# EAGLE board CRBN-60-soldered (EAGLE 9.6.2), part 1 of 2
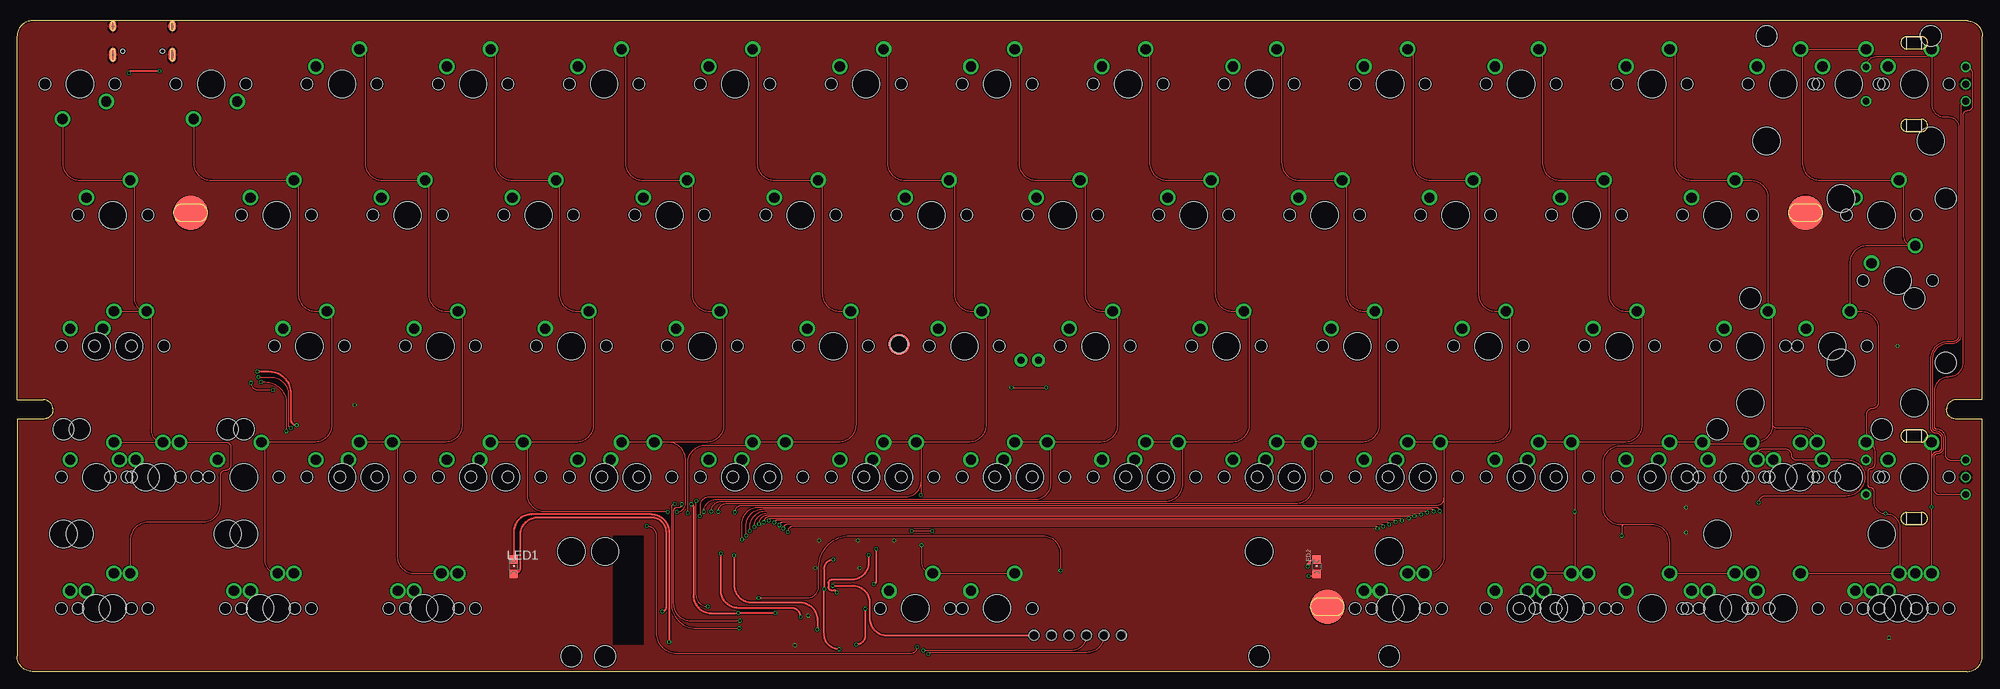
[diagram p0: board, top side]
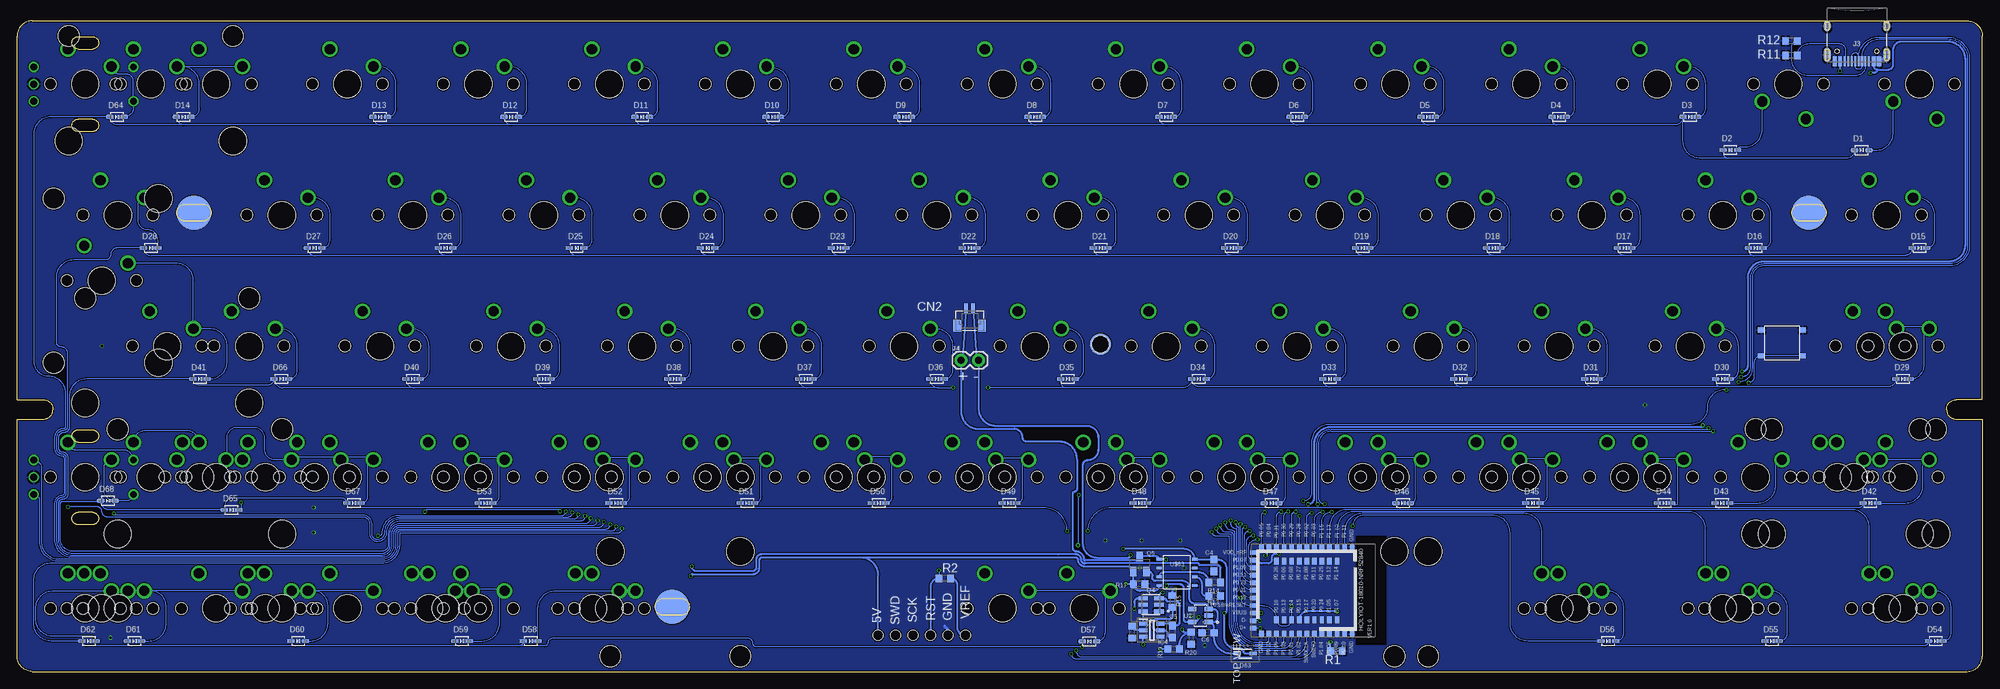
[diagram p1: board, bottom side, seen from below]

Size 285.75 x 94.59 mm. Coordinates in mm from the lower left corner, seen from the top.
Outline: 283.54,94.59 2.21,94.59 arc90 0,92.38 0,39.5 3.81,39.5 arc-90 5.21,38.1 arc-90 3.81,36.7 0,36.7 0,2.21 arc90 2.21,0 283.54,0 arc90 285.75,2.21 285.75,36.7 281.94,36.7 arc-90 280.54,38.1 arc-90 281.94,39.5 285.75,39.5 285.75,92.38 arc90 283.54,94.59
Copper layers (1*16): Top 0.035559375mm / dielectric 1.6mm / Bottom 0.035559375mm
Design rules "jlcpcb2layer": minimum track width 5mil, minimum drill 12mil, track to track 5mil, track to pad 5mil, pad to pad 5mil, via to via 5mil, smd to smd 5mil, copper to edge 8mil, drill to drill 6mil, minimum pad ring 5mil, minimum via ring 3mil, stop-mask expansion 2.5mil, vias tented up to drill 0mil, thermal gap 10mil

## Footprints (pad centres in the part's own frame; a part is rotated, then mirrored left to right if it is on the bottom)
CHERRY-SOLDER = drill 1.499: P$1 -3.81,2.54; P$2 2.54,5.08 | hole 3.988: 0,0 | hole 1.702: -5.08,0; 5.08,0
C0603 = smd 1.1 x 1: 1 -0.85,0; 2 0.85,0
BM02B-SRSS-TB = smd 0.6 x 1.55: 1 0.5,0; 2 -0.5,0 | smd 1.2 x 1.8: M1 1.8,-2.525; M2 -1.8,-2.525
SOD-323 = smd 1.14 x 0.52: A 1.04,0; C -1.04,0
SOD2713X115N = smd 1.125 x 0.5: 1 -1.162,0; 2 1.162,0
PCBCOMPONENT_1 = smd 0.7 x 0.9: D+ 40.127,0.284; D- 39.027,0.284; P0.07 30.227,0.284; P0.12 32.427,0.284; P0.18 36.827,0.284; P0.19 35.727,0.284; P0.21 34.627,0.284; P0.23 33.527,0.284; P1.09 31.327,0.284; VBUS 37.927,0.284; VDD_NRF 29.127,0.284 | smd 0.9 x 0.7: GND 28.277,14.684; GND1 40.977,1.484; GND2 40.977,14.684; P0.02 28.277,8.084; P0.03 28.277,9.184; P0.04 28.277,2.584; P0.05 28.277,1.484; P0.09 40.977,12.484; P0.10 40.977,13.584; P0.22 40.977,2.584; P0.28 28.277,6.984; P0.29 28.277,5.884; P0.30 28.277,4.784; P0.31 28.277,3.684; P1.00 40.977,3.684; P1.01 40.977,5.884; P1.02 40.977,6.984; P1.03 40.977,4.784; P1.04 40.977,10.284; P1.06 40.977,11.384; P1.10 28.277,12.484; P1.11 28.277,13.584; P1.13 28.277,11.384; P1.15 28.277,10.284; SWDCLK 40.977,8.084; SWDIO 40.977,9.184 | smd 1 x 0.7: P0.06 30.377,4.784; P0.08 30.377,5.884; P0.11 30.377,9.184; P0.13 38.877,4.784; P0.14 38.877,5.884; P0.15 38.877,6.984; P0.16 38.877,3.684; P0.17 38.877,8.084; P0.25 30.377,10.284; P0.26 30.377,3.684; P0.27 30.377,6.984; P1.05 38.877,11.384; P1.07 38.877,12.484; P1.08 30.377,8.084; P1.12 30.377,11.384; P1.14 30.377,12.484 | smd 1 x 0.6: P0.20 38.877,9.184; P0.24 38.877,10.284
SOT95P280X145-6N = smd 1.2 x 0.6: 1 -1.25,0.95; 2 -1.25,0; 3 -1.25,-0.95; 4 1.25,-0.95; 5 1.25,0; 6 1.25,0.95
SPARKFUN-CONNECTORS_USB-C-16P = smd 0.3 x 1.45: A5 -1.25,0; A6 -0.25,0; A7 0.25,0; A8 1.25,0; B5 1.75,0; B6 0.75,0; B7 -0.75,0; B8 -1.75,0 | smd 0.6 x 1.45: GND -3.225,0; GND2 3.225,0 | smd 1 x 2.1: SHLD1 -4.32,-0.915; SHLD2 4.32,-0.915 | smd 1 x 2.1 bottom: SHLD3 -4.32,-0.915; SHLD4 4.32,-0.915 | smd 1 x 1.6: SHLD5 -4.32,-5.095; SHLD8 4.32,-5.095 | smd 1 x 1.6 bottom: SHLD6 -4.32,-5.095; SHLD7 4.32,-5.095 | smd 0.55 x 1.45: VBUS1 -2.45,0; VBUS2 2.45,0 | hole 0.65: -2.89,-1.445; 2.89,-1.445
1X02 = drill 1.016 pad 1.88: 1 0,0; 2 2.54,0
CHIPLED_0805 = smd 1.2 x 1.2: A 0,-1.05; C 0,1.05
1X06_HOLES_ONLY = drill 0.889 pad 0.813: 1 0,0; 2 2.54,0; 3 5.08,0; 4 7.62,0; 5 10.16,0; 6 12.7,0 | hole 1.473: 0,0; 2.54,0; 5.08,0; 7.62,0; 10.16,0; 12.7,0
FS8205 = smd 1.4 x 0.6: 1 -0.5,0.95; 2 -0.5,0; 3 -0.5,-0.95; 4 1.8,0.95; 5 1.8,0; 6 1.8,-0.95
SOT23 = smd 1 x 1.4: 1 -0.95,-1.1; 2 0.95,-1.1; 3 0,1.1
R0603 = smd 1 x 1.1: 1 -0.85,0; 2 0.85,0
SOT95P285X140-5N = smd 1.35 x 0.6: 1 -1.185,0.95; 2 -1.185,0; 3 -1.185,-0.95; 4 1.185,-0.95; 5 1.185,0.95
CHERRY-ENCODER = drill 0.991: A -2.5,-7.5; B 2.5,-7.5; GND 0,-7.5; S1 -2.5,7; S2 2.5,7
SMD-BUTTON = smd 1 x 0.75: A -3,1.875; B 3,1.875; C -3,-1.875; D 3,-1.875
SOT23-8 = smd 0.42 x 0.835: 1 -1.905,-2.58; 2 -0.635,-2.58; 3 0.635,-2.58; 4 1.905,-2.58; 5 1.905,2.58; 6 0.635,2.58; 7 -0.635,2.58; 8 -1.905,2.58
2.5MM_ELONGATED = smd 5 x 5: P$1 0,0 | smd 5 x 5 bottom: P$2 0,0
2.5MM_HOLE = smd 3.1 x 3.1 bottom: P$1 0,0 | smd 3.1 x 3.1: P$2 0,0 | hole 2.5: 0,0
STAB-2U = hole 3.988: -11.938,-8.255; 11.938,-8.255 | hole 3.048: -11.938,6.985; 11.938,6.985
STAB-6.25U = hole 3.988: -50,-8.255; 50,-8.255 | hole 3.048: -50,6.985; 50,6.985
STAB-7U = hole 3.988: -57,-8.255; 57,-8.255 | hole 3.048: -57,6.985; 57,6.985

## Placement (x,y rotation side)
0  CHERRY-SOLDER  [CHERRY-SOLDER]  199.64,85.39 0 top
1  CHERRY-SOLDER  [CHERRY-SOLDER]  28.19,85.39 180 top
1U_1  CHERRY-SOLDER  [CHERRY-SOLDER]  199.64,9.19 0 top
1U_2  CHERRY-SOLDER  [CHERRY-SOLDER]  218.69,9.19 0 top
1U_3  CHERRY-SOLDER  [CHERRY-SOLDER]  237.74,9.19 0 top
1U_4  CHERRY-SOLDER  [CHERRY-SOLDER]  256.79,9.19 0 top
1U_5  CHERRY-SOLDER  [CHERRY-SOLDER]  275.84,9.19 0 top
2  CHERRY-SOLDER  [CHERRY-SOLDER]  47.24,85.39 0 top
3  CHERRY-SOLDER  [CHERRY-SOLDER]  66.29,85.39 0 top
4  CHERRY-SOLDER  [CHERRY-SOLDER]  85.34,85.39 0 top
5  CHERRY-SOLDER  [CHERRY-SOLDER]  104.39,85.39 0 top
6  CHERRY-SOLDER  [CHERRY-SOLDER]  123.44,85.39 0 top
7  CHERRY-SOLDER  [CHERRY-SOLDER]  142.49,85.39 0 top
8  CHERRY-SOLDER  [CHERRY-SOLDER]  161.54,85.39 0 top
9  CHERRY-SOLDER  [CHERRY-SOLDER]  180.59,85.39 0 top
#_ISO  CHERRY-SOLDER  [CHERRY-SOLDER]  32.96,28.24 0 top
'  CHERRY-SOLDER  [CHERRY-SOLDER]  232.98,47.29 0 top
,  CHERRY-SOLDER  [CHERRY-SOLDER]  185.36,28.24 0 top
,_1  CHERRY-SOLDER  [CHERRY-SOLDER]  180.59,28.24 0 top
-  CHERRY-SOLDER  [CHERRY-SOLDER]  218.69,85.39 0 top
.  CHERRY-SOLDER  [CHERRY-SOLDER]  204.41,28.24 0 top
._1  CHERRY-SOLDER  [CHERRY-SOLDER]  199.64,28.24 0 top
/  CHERRY-SOLDER  [CHERRY-SOLDER]  223.46,28.24 0 top
/_1  CHERRY-SOLDER  [CHERRY-SOLDER]  218.69,28.24 0 top
=  CHERRY-SOLDER  [CHERRY-SOLDER]  237.74,85.39 0 top
[  CHERRY-SOLDER  [CHERRY-SOLDER]  228.22,66.34 0 top
\  CHERRY-SOLDER  [CHERRY-SOLDER]  271.08,66.34 0 top
]  CHERRY-SOLDER  [CHERRY-SOLDER]  247.27,66.34 0 top
A  CHERRY-SOLDER  [CHERRY-SOLDER]  42.48,47.29 0 top
B  CHERRY-SOLDER  [CHERRY-SOLDER]  128.21,28.24 0 top
B_1  CHERRY-SOLDER  [CHERRY-SOLDER]  123.44,28.24 0 top
BS  CHERRY-SOLDER  [CHERRY-SOLDER]  266.32,85.39 0 top
C  CHERRY-SOLDER  [CHERRY-SOLDER]  90.11,28.24 0 top
C4  10u  [C0603]  111.73,15.43 270 bottom
C5  100n  [C0603]  117.76,5.8 90 bottom
C6  4.7u  [C0603]  112.57,5.63 180 bottom
C_1  CHERRY-SOLDER  [CHERRY-SOLDER]  85.34,28.24 0 top
CAPS  CHERRY-SOLDER  [CHERRY-SOLDER]  16.29,47.29 0 top
CAPS_STEP  CHERRY-SOLDER  [CHERRY-SOLDER]  11.53,47.29 0 top
CN2  BM02B-SRSS-TB  [BM02B-SRSS-TB]  147.27,52.79 0 bottom
COLON  CHERRY-SOLDER  [CHERRY-SOLDER]  213.93,47.29 0 top
D  CHERRY-SOLDER  [CHERRY-SOLDER]  80.58,47.29 0 top
D1  1N4148WS  [SOD-323]  17.54,75.79 0 bottom
D2  1N4148WS  [SOD-323]  36.64,75.82 0 bottom
D3  1N4148WS  [SOD-323]  42.48,80.63 0 bottom
D4  1N4148WS  [SOD-323]  61.53,80.63 0 bottom
D5  1N4148WS  [SOD-323]  80.58,80.63 0 bottom
D6  1N4148WS  [SOD-323]  99.63,80.63 0 bottom
D7  1N4148WS  [SOD-323]  118.68,80.63 0 bottom
D8  1N4148WS  [SOD-323]  137.73,80.63 0 bottom
D9  1N4148WS  [SOD-323]  156.78,80.63 0 bottom
D10  1N4148WS  [SOD-323]  175.83,80.63 0 bottom
D11  1N4148WS  [SOD-323]  194.88,80.63 0 bottom
D12  1N4148WS  [SOD-323]  213.93,80.63 0 bottom
D13  1N4148WS  [SOD-323]  232.98,80.63 0 bottom
D14  1N4148WS  [SOD-323]  261.56,80.63 0 bottom
D15  1N4148WS  [SOD-323]  9.14,61.58 0 bottom
D16  1N4148WS  [SOD-323]  32.96,61.58 0 bottom
D17  1N4148WS  [SOD-323]  52.01,61.58 0 bottom
D18  1N4148WS  [SOD-323]  71.06,61.58 0 bottom
D19  1N4148WS  [SOD-323]  90.11,61.58 0 bottom
D20  1N4148WS  [SOD-323]  109.16,61.58 0 bottom
D21  1N4148WS  [SOD-323]  128.21,61.58 0 bottom
D22  1N4148WS  [SOD-323]  147.26,61.58 0 bottom
D23  1N4148WS  [SOD-323]  166.31,61.58 0 bottom
D24  1N4148WS  [SOD-323]  185.36,61.58 0 bottom
D25  1N4148WS  [SOD-323]  204.41,61.58 0 bottom
D26  1N4148WS  [SOD-323]  223.46,61.58 0 bottom
D27  1N4148WS  [SOD-323]  242.51,61.58 0 bottom
D28  1N4148WS  [SOD-323]  266.32,61.58 0 bottom
D29  1N4148WS  [SOD-323]  11.53,42.53 0 bottom
D30  1N4148WS  [SOD-323]  37.72,42.53 0 bottom
D31  1N4148WS  [SOD-323]  56.77,42.53 0 bottom
D32  1N4148WS  [SOD-323]  75.82,42.53 0 bottom
D33  1N4148WS  [SOD-323]  94.87,42.53 0 bottom
D34  1N4148WS  [SOD-323]  113.92,42.53 0 bottom
D35  1N4148WS  [SOD-323]  132.97,42.53 0 bottom
D36  1N4148WS  [SOD-323]  152.02,42.53 0 bottom
D37  1N4148WS  [SOD-323]  171.07,42.53 0 bottom
D38  1N4148WS  [SOD-323]  190.12,42.53 0 bottom
D39  1N4148WS  [SOD-323]  209.17,42.53 0 bottom
D40  1N4148WS  [SOD-323]  228.22,42.53 0 bottom
D41  1N4148WS  [SOD-323]  259.18,42.53 0 bottom
D42  1N4148WS  [SOD-323]  16.29,24.5 0 bottom
D43  1N4148WS  [SOD-323]  37.82,24.5 0 bottom
D44  1N4148WS  [SOD-323]  46.2,24.5 0 bottom
D45  1N4148WS  [SOD-323]  65.35,24.5 0 bottom
D46  1N4148WS  [SOD-323]  84.23,24.47 0 bottom
D47  1N4148WS  [SOD-323]  103.35,24.47 0 bottom
D48  1N4148WS  [SOD-323]  122.45,24.5 0 bottom
D49  1N4148WS  [SOD-323]  141.48,24.5 0 bottom
D50  1N4148WS  [SOD-323]  160.48,24.5 0 bottom
D51  1N4148WS  [SOD-323]  179.58,24.5 0 bottom
D52  1N4148WS  [SOD-323]  198.65,24.5 0 bottom
D53  1N4148WS  [SOD-323]  217.66,24.5 0 bottom
D54  1N4148WS  [SOD-323]  6.76,4.43 0 bottom
D55  1N4148WS  [SOD-323]  30.58,4.43 0 bottom
D56  1N4148WS  [SOD-323]  54.39,4.43 0 bottom
D57  1N4148WS  [SOD-323]  129.84,4.38 0 bottom
D58  1N4148WS  [SOD-323]  211.08,4.43 0 bottom
D59  1N4148WS  [SOD-323]  221.08,4.43 0 bottom
D60  1N4148WS  [SOD-323]  244.89,4.43 0 bottom
D61  1N4148WS  [SOD-323]  268.7,4.43 0 bottom
D62  1N4148WS  [SOD-323]  275.31,4.43 0 bottom
D63  SD103AWS-E3-08  [SOD2713X115N]  107.18,2.59 0 bottom
D64  1N4148WS  [SOD-323]  271.25,80.63 0 bottom
D65  1N4148WS  [SOD-323]  254.58,23.48 0 bottom
D66  1N4148WS  [SOD-323]  247.35,42.53 0 bottom
D67  1N4148WS  [SOD-323]  236.78,24.5 0 bottom
D68  1N4148WS  [SOD-323]  272.57,24.83 0 bottom
E  CHERRY-SOLDER  [CHERRY-SOLDER]  75.82,66.34 0 top
ENTER  CHERRY-SOLDER  [CHERRY-SOLDER]  263.94,47.29 0 top
ESC  CHERRY-SOLDER  [CHERRY-SOLDER]  9.14,85.39 180 top
EXTRA_1U_LEFT  CHERRY-SOLDER  [CHERRY-SOLDER]  242.51,28.24 0 top
F  CHERRY-SOLDER  [CHERRY-SOLDER]  99.63,47.29 0 top
FN  CHERRY-SOLDER  [CHERRY-SOLDER]  273.46,9.19 0 top
G  CHERRY-SOLDER  [CHERRY-SOLDER]  118.68,47.29 0 top
H  CHERRY-SOLDER  [CHERRY-SOLDER]  137.73,47.29 0 top
I  CHERRY-SOLDER  [CHERRY-SOLDER]  171.09,66.34 0 top
IC3  HOLYIOT_18010  [PCBCOMPONENT_1]  106.31,46.42 270 bottom
IC4  FS312F-G  [SOT95P280X145-6N]  120.76,6.01 0 bottom
ISO_#  CHERRY-SOLDER  [CHERRY-SOLDER]  252.03,47.29 0 top
ISO_ENTER  CHERRY-SOLDER  [CHERRY-SOLDER]  273.46,56.82 0 top
J  CHERRY-SOLDER  [CHERRY-SOLDER]  156.78,47.29 0 top
J3  [SPARKFUN-CONNECTORS_USB-C-16P]  18.24,88.73 180 bottom
J4  [1X02]  148.49,45.25 0 bottom
K  CHERRY-SOLDER  [CHERRY-SOLDER]  175.83,47.29 0 top
L  CHERRY-SOLDER  [CHERRY-SOLDER]  194.88,47.29 0 top
L_1.25U_SHIFT  CHERRY-SOLDER  [CHERRY-SOLDER]  11.53,28.24 0 top
L_2U_SHIFT  CHERRY-SOLDER  [CHERRY-SOLDER]  18.67,28.24 0 top
L_SHIFT  CHERRY-SOLDER  [CHERRY-SOLDER]  21.05,28.24 0 top
LALT  CHERRY-SOLDER  [CHERRY-SOLDER]  59.15,9.19 0 top
LALT_1.5U  CHERRY-SOLDER  [CHERRY-SOLDER]  61.53,9.19 0 top
LCTRL  CHERRY-SOLDER  [CHERRY-SOLDER]  11.53,9.19 0 top
LCTRL_1.5U  CHERRY-SOLDER  [CHERRY-SOLDER]  13.91,9.19 0 top
LED1  [CHIPLED_0805]  72.2,15.23 0 top
LED2  [CHIPLED_0805]  188.98,15.23 0 top
LWIN  CHERRY-SOLDER  [CHERRY-SOLDER]  35.34,9.19 0 top
LWIN_1U  CHERRY-SOLDER  [CHERRY-SOLDER]  37.72,9.19 0 top
M  CHERRY-SOLDER  [CHERRY-SOLDER]  166.31,28.24 0 top
M_1  CHERRY-SOLDER  [CHERRY-SOLDER]  161.54,28.24 0 top
MENU  CHERRY-SOLDER  [CHERRY-SOLDER]  225.84,9.19 0 top
MENU_1U  CHERRY-SOLDER  [CHERRY-SOLDER]  247.27,9.19 0 top
N  CHERRY-SOLDER  [CHERRY-SOLDER]  147.26,28.24 0 top
N_1  CHERRY-SOLDER  [CHERRY-SOLDER]  142.49,28.24 0 top
O  CHERRY-SOLDER  [CHERRY-SOLDER]  190.12,66.34 0 top
P  CHERRY-SOLDER  [CHERRY-SOLDER]  209.17,66.34 0 top
PROG1  [1X06_HOLES_ONLY]  147.86,5.25 0 top
Q  CHERRY-SOLDER  [CHERRY-SOLDER]  37.72,66.34 0 top
Q4  FS8205  [FS8205]  120.23,9.68 180 bottom
Q5  PMOSFET  [SOT23]  122.52,15.64 0 bottom
R  CHERRY-SOLDER  [CHERRY-SOLDER]  94.87,66.34 0 top
R1  1k  [R0603]  93.93,2.96 180 bottom
R2  10k  [R0603]  150.88,13.55 180 bottom
R11  5.1k  [R0603]  27.76,89.58 0 bottom
R12  5.1k  [R0603]  27.76,91.67 0 bottom
R13  2k  [R0603]  111.63,10.99 180 bottom
R14  1k  [R0603]  111.63,12.96 180 bottom
R15  100  [R0603]  117.77,10.2 90 bottom
R16  2k  [R0603]  123.64,5.72 90 bottom
R17  100k  [R0603]  122.6,12.73 180 bottom
R19  2k  [R0603]  117.58,3.26 0 bottom
R20  2k  [R0603]  115.03,4.84 270 bottom
R_ALT_1.5  CHERRY-SOLDER  [CHERRY-SOLDER]  223.46,9.19 0 top
R_CTRL_1.5U  CHERRY-SOLDER  [CHERRY-SOLDER]  271.08,9.19 0 top
R_SHIFT  CHERRY-SOLDER  [CHERRY-SOLDER]  259.18,28.24 0 top
R_SHIFT_1.75U_LEFT  CHERRY-SOLDER  [CHERRY-SOLDER]  249.65,28.24 0 top
R_SHIFT_1.75U_RIGHT  CHERRY-SOLDER  [CHERRY-SOLDER]  266.32,28.24 0 top
RALT  CHERRY-SOLDER  [CHERRY-SOLDER]  202.03,9.19 0 top
RCTRL  CHERRY-SOLDER  [CHERRY-SOLDER]  249.65,9.19 0 top
S  CHERRY-SOLDER  [CHERRY-SOLDER]  61.53,47.29 0 top
SPACE_6.25U  CHERRY-SOLDER  [CHERRY-SOLDER]  130.59,9.19 0 top
SPACE_7U  CHERRY-SOLDER  [CHERRY-SOLDER]  142.49,9.19 0 top
SPLIT_BS_1  CHERRY-SOLDER  [CHERRY-SOLDER]  256.79,85.39 0 top
SPLIT_BS_2  CHERRY-SOLDER  [CHERRY-SOLDER]  275.84,85.39 0 top
T  CHERRY-SOLDER  [CHERRY-SOLDER]  113.92,66.34 0 top
TAB  CHERRY-SOLDER  [CHERRY-SOLDER]  13.91,66.34 0 top
U  CHERRY-SOLDER  [CHERRY-SOLDER]  152.02,66.34 0 top
U2  AP2112K-3.3TRG1  [SOT95P285X140-5N]  113.69,8.12 180 bottom
U$1  CHERRY-ENCODER  [CHERRY-ENCODER]  275.84,85.39 90 top
U$2  CHERRY-ENCODER  [CHERRY-ENCODER]  275.84,28.24 90 top
U$62  SMD-BUTTON  [SMD-BUTTON]  29.13,47.77 0 bottom
U$63  TP4056  [SOT23-8]  117.11,14.41 90 bottom
U$64  2.5MM_ELONGATED  [2.5MM_ELONGATED]  190.5,9.4 0 top
U$65  2.5MM_ELONGATED  [2.5MM_ELONGATED]  260.05,66.71 0 top
U$66  2.5MM_HOLE  [2.5MM_HOLE]  128.19,47.6 0 top
U$67  2.5MM_ELONGATED  [2.5MM_ELONGATED]  25.2,66.69 0 top
U$68  STAB-2U  [STAB-2U]  21.05,28.24 0 top
U$69  STAB-2U  [STAB-2U]  263.94,47.29 0 top
U$70  STAB-2U  [STAB-2U]  266.32,85.39 0 top
U$71  STAB-2U  [STAB-2U]  259.18,28.24 0 top
U$72  STAB-6U  [STAB-6.25U]  130.59,9.19 180 top
U$83  STAB-2U  [STAB-2U]  273.46,56.82 270 top
U$91  STAB-7U  [STAB-7U]  142.49,9.19 180 top
U$108  STAB-2U  [STAB-2U]  18.67,28.24 0 top
UP  CHERRY-SOLDER  [CHERRY-SOLDER]  237.74,28.24 0 top
V  CHERRY-SOLDER  [CHERRY-SOLDER]  109.16,28.24 0 top
V_1  CHERRY-SOLDER  [CHERRY-SOLDER]  104.39,28.24 0 top
W  CHERRY-SOLDER  [CHERRY-SOLDER]  56.77,66.34 0 top
X  CHERRY-SOLDER  [CHERRY-SOLDER]  71.06,28.24 0 top
X5U_1  CHERRY-SOLDER  [CHERRY-SOLDER]  256.79,28.24 0 top
X5U_2  CHERRY-SOLDER  [CHERRY-SOLDER]  275.84,28.24 0 top
X_1  CHERRY-SOLDER  [CHERRY-SOLDER]  66.29,28.24 0 top
Y  CHERRY-SOLDER  [CHERRY-SOLDER]  132.97,66.34 0 top
Z  CHERRY-SOLDER  [CHERRY-SOLDER]  52.01,28.24 0 top
Z_1  CHERRY-SOLDER  [CHERRY-SOLDER]  47.24,28.24 0 top

## Library data of the parts
0 1 1U_1-1U_5 2-9 #_ISO ' , ,_1 - . ._1 / /_1 = [ \ ] A B B_1 BS C C_1 CAPS CAPS_STEP COLON D E ENTER ESC EXTRA_1U_LEFT F FN G H I ISO_# ISO_ENTER J K L L_1.25U_SHIFT L_2U_SHIFT L_SHIFT LALT LALT_1.5U LCTRL LCTRL_1.5U LWIN LWIN_1U M M_1 MENU MENU_1U N N_1 O P Q R R_ALT_1.5 R_CTRL_1.5U R_SHIFT R_SHIFT_1.75U_LEFT R_SHIFT_1.75U_RIGHT RALT RCTRL S SPACE_6.25U SPACE_7U SPLIT_BS_1 SPLIT_BS_2 T TAB U U$1 U$2 U$62 U$64-U$72 U$83 U$91 U$108 UP V V_1 W X X5U_1 X5U_2 X_1 Y Z Z_1 = Volume_V1
C4-C6 = resistor
CN2 = con-JST SH
D1-D62 D64-D68 = Diodes; CREATED_BY: PCBLayout.com; DIGIKEY_PART_NUMBER: 1N4148WSFSTR-ND; MANUFACTURER: Diodes Incorporated; MPN: 1N4148WS; PACKAGE: SOD-323
D63 = SD103AWS-E3-08; ARROW_PART_NUMBER: SD103AWS-E3-08; ARROW_PRICE-STOCK: https://www.arrow.com/en/products/sd103aws-e3-08/vishay; DESCRIPTION: Vishay SD103AWS-E3-08, SMT Schottky Diode, 40V 350mA, 10ns, 2-Pin SOD-323; HEIGHT: 1.15mm; MANUFACTURER_NAME: Vishay; MANUFACTURER_PART_NUMBER: SD103AWS-E3-08; MOUSER_PART_NUMBER: 78-SD103AWS-E3-08; MOUSER_PRICE-STOCK: https://www.mouser.co.uk/ProductDetail/Vishay-Semiconductors/SD103AWS-E3-08?qs=S660mHfF5o1xcba7ic5A%252BA%3D%3D
IC3 = HOLYIOT-18010-VER1.0-0.8MM
IC4 = FS312F-G; DESCRIPTION: Battery Protection ICs SOT-23-6 RoHS; HEIGHT: 1.45mm; MANUFACTURER_NAME: Fortune Semicon; MANUFACTURER_PART_NUMBER: FS312F-G
J3 = USB-C-Breakout; PROD_ID: CONN-14122
J4 = SparkFun-Connectors
LED1 LED2 = adafruit
PROG1 = SparkFun-Connectors; PROD_ID: CONN-08437
Q4 = FS8205; DESCRIPTION: DUAL N-CHANNEL ENHANCEMENT MODE POWER MOFSET; HEIGHT: 1mm; MANUFACTURER_NAME: Fortune Semiconductor Corporation; MANUFACTURER_PART_NUMBER: FS8205
Q5 = Transistor; CATEGORY: Transistor; MPN: SL2301S; SUB-CATEGORY: MOSFET; TYPE: P-Channel
R1 R2 R11-R17 R19 R20 = rcl; SPICEPREFIX: R
U2 = AP2112K-3.3TRG1; AVAILABILITY: Good; DESCRIPTION: Linear Voltage Regulator IC 1 Output 600mA SOT-25; MF: Diodes Inc.; MP: AP2112K-3.3TRG1; PACKAGE: SOT-753 Diodes Inc.; PRICE: None; PURCHASE-URL: https://pricing.snapeda.com/search/part/AP2112K-3.3TRG1/?ref=eda
U$63 = TP4056

## Nets
A: IC3.P1.01 U$1.A U$2.A
B: IC3.P1.03 U$1.B U$2.B
BLED: IC3.P0.15 LED1.A
BVOLT: IC3.P0.04 R19.2 R20.1
COL1: CAPS.P$2 CAPS_STEP.P$2 ESC.P$2 IC3.P1.13 L_1.25U_SHIFT.P$2 L_2U_SHIFT.P$2 L_SHIFT.P$2 LCTRL.P$2 LCTRL_1.5U.P$2 TAB.P$2
COL2: 1.P$2 #_ISO.P$2 A.P$2 IC3.P1.10 LWIN.P$2 LWIN_1U.P$2 Q.P$2
COL3: 2.P$2 IC3.P1.11 LALT.P$2 LALT_1.5U.P$2 S.P$2 W.P$2 Z.P$2 Z_1.P$2
COL4: 3.P$2 D.P$2 E.P$2 IC3.P1.15 X.P$2 X_1.P$2
COL5: 4.P$2 C.P$2 C_1.P$2 F.P$2 IC3.P0.03 R.P$2
COL6: 5.P$2 G.P$2 IC3.P0.02 T.P$2 V.P$2 V_1.P$2
COL7: 6.P$2 B.P$2 B_1.P$2 H.P$2 IC3.P0.28 SPACE_6.25U.P$2 SPACE_7U.P$2 Y.P$2
COL8: 7.P$2 IC3.P0.29 J.P$2 N.P$2 N_1.P$2 U.P$2
COL9: 8.P$2 I.P$2 IC3.P0.30 K.P$2 M.P$2 M_1.P$2
COL10: 9.P$2 ,.P$2 ,_1.P$2 IC3.P0.31 L.P$2 O.P$2
COL11: 0.P$2 1U_1.P$2 ..P$2 ._1.P$2 COLON.P$2 IC3.P0.05 P.P$2 RALT.P$2
COL12: 1U_2.P$2 '.P$2 -.P$2 /.P$2 /_1.P$2 [.P$2 IC3.P0.07 MENU.P$2 R_ALT_1.5.P$2
COL13: 1U_3.P$2 =.P$2 ].P$2 EXTRA_1U_LEFT.P$2 IC3.P1.09 ISO_#.P$2 MENU_1U.P$2 R_SHIFT.P$2 R_SHIFT_1.75U_LEFT.P$2 RCTRL.P$2 UP.P$2
COL14: 1U_4.P$2 \.P$2 BS.P$2 ENTER.P$2 FN.P$2 IC3.P0.12 ISO_ENTER.P$2 R_CTRL_1.5U.P$2 R_SHIFT_1.75U_RIGHT.P$2 SPLIT_BS_1.P$2 X5U_1.P$2
COL15: 1U_5.P$2 IC3.P0.23 SPLIT_BS_2.P$2 U$1.S2 U$2.S2 X5U_2.P$2
D+: IC3.D+ J3.A6 J3.B6
D-: IC3.D- J3.A7 J3.B7
G_BAT: C5.2 CN2.1 IC4.6 J4.2 Q4.3
GND: C4.2 C6.2 IC3.GND IC3.GND1 IC3.GND2 J3.GND J3.GND2 J3.SHLD1 J3.SHLD2 J3.SHLD3 J3.SHLD4 J3.SHLD5 J3.SHLD6 J3.SHLD7 J3.SHLD8 PROG1.2 Q4.1 R1.1 R11.1 R12.1 R13.1 R16.1 R17.1 R20.2 U2.2 U$1.GND U$2.GND U$62.A U$62.B U$63.1 U$63.3
N$1: D1.A ESC.P$1
N$2: LED1.C R1.2
N$3: 1U_5.P$1 D62.A
N$4: =.P$1 D13.A
N$5: -.P$1 D12.A
N$6: 0.P$1 D11.A
N$7: 9.P$1 D10.A
N$8: 8.P$1 D9.A
N$9: 7.P$1 D8.A
N$10: 6.P$1 D7.A
N$11: 5.P$1 D6.A
N$12: 4.P$1 D5.A
N$13: 3.P$1 D4.A
N$14: 2.P$1 D3.A
N$15: 1.P$1 D2.A
N$16: D15.A TAB.P$1
N$17: D45.A X.P$1 X_1.P$1
N$18: \.P$1 D28.A
N$19: ].P$1 D27.A
N$20: [.P$1 D26.A
N$21: D25.A P.P$1
N$22: D24.A O.P$1
N$23: D23.A I.P$1
N$24: D22.A U.P$1
N$25: D21.A Y.P$1
N$26: D20.A T.P$1
N$27: D19.A R.P$1
N$28: D18.A E.P$1
N$29: D17.A W.P$1
N$30: D16.A Q.P$1
N$31: D47.A V.P$1 V_1.P$1
N$32: ,.P$1 ,_1.P$1 D51.A
N$33: D41.A ENTER.P$1 ISO_ENTER.P$1
N$34: '.P$1 D40.A
N$35: COLON.P$1 D39.A
N$36: D38.A L.P$1
N$37: D37.A K.P$1
N$38: D36.A J.P$1
N$39: D35.A H.P$1
N$40: D34.A G.P$1
N$41: D33.A F.P$1
N$42: D32.A D.P$1
N$43: D31.A S.P$1
N$44: A.P$1 D30.A
N$45: D42.A L_1.25U_SHIFT.P$1 L_2U_SHIFT.P$1 L_SHIFT.P$1
N$46: ..P$1 ._1.P$1 D52.A
N$47: D67.A EXTRA_1U_LEFT.P$1 R_SHIFT.P$1 R_SHIFT_1.75U_LEFT.P$1 UP.P$1
N$48: D68.A U$2.S1 X5U_2.P$1
N$49: D64.A SPLIT_BS_2.P$1 U$1.S1
N$52: #_ISO.P$1 D43.A
N$53: D44.A Z.P$1 Z_1.P$1
N$54: B.P$1 B_1.P$1 D48.A
N$55: C.P$1 C_1.P$1 D46.A
N$56: D49.A N.P$1 N_1.P$1
N$57: D50.A M.P$1 M_1.P$1
N$58: D54.A LCTRL.P$1 LCTRL_1.5U.P$1
N$59: /.P$1 /_1.P$1 D53.A
N$60: 1U_4.P$1 D61.A FN.P$1 R_CTRL_1.5U.P$1
N$61: 1U_3.P$1 D60.A MENU_1U.P$1 RCTRL.P$1
N$62: 1U_2.P$1 D59.A MENU.P$1 R_ALT_1.5.P$1
N$63: 1U_1.P$1 D58.A RALT.P$1
N$64: D57.A SPACE_6.25U.P$1 SPACE_7U.P$1
N$65: D56.A LALT.P$1 LALT_1.5U.P$1
N$66: D55.A LWIN.P$1 LWIN_1U.P$1
N$68: BS.P$1 D14.A SPLIT_BS_1.P$1
N$71: D66.A ISO_#.P$1
N$72: J3.B5 R11.2
N$73: J3.A5 R12.2
N$74: R13.2 U$63.2
N$75: LED2.C R14.1
N$76: R14.2 U$63.7
N$77: IC4.1 Q4.4
N$78: IC4.3 Q4.6
N$79: C5.1 IC4.5 R15.1
N$80: IC4.2 R16.2
N$81: C6.1 D63.1 Q5.2 U2.1 U2.3
N$82: CAPS.P$1 CAPS_STEP.P$1 D29.A
N$83: D65.A R_SHIFT_1.75U_RIGHT.P$1 X5U_1.P$1
POWER_PIN: IC3.P0.13
RESET: IC3.P0.14 IC3.P0.16 IC3.P0.18 PROG1.3 R2.2 U$62.C U$62.D
ROW1: D1.C D2.C D3.C D4.C D5.C D6.C D7.C D8.C D9.C D10.C D11.C D12.C D13.C D14.C D64.C IC3.P1.00
ROW2: D15.C D16.C D17.C D18.C D19.C D20.C D21.C D22.C D23.C D24.C D25.C D26.C D27.C D28.C IC3.P0.22
ROW3: D29.C D30.C D31.C D32.C D33.C D34.C D35.C D36.C D37.C D38.C D39.C D40.C D41.C D66.C IC3.P0.19
ROW4: D42.C D43.C D44.C D45.C D46.C D47.C D48.C D49.C D50.C D51.C D52.C D53.C D65.C D67.C D68.C IC3.P0.21
ROW5: D54.C D55.C D56.C D57.C D58.C D59.C D60.C D61.C D62.C IC3.P1.02
RXD: IC3.P0.08
SCK: IC3.SWDCLK PROG1.4
SWD: IC3.SWDIO PROG1.5
TXD: IC3.P0.06
V_BATT: CN2.2 J4.1 Q5.3 R15.2 R19.1 U$63.5
V_USB: C4.1 D63.2 IC3.VBUS J3.VBUS1 J3.VBUS2 LED2.A PROG1.6 Q5.1 R17.2 U$63.4 U$63.8
VDD_NRF: IC3.VDD_NRF PROG1.1 R2.1 U2.5